# EAGLE board artlight (EAGLE 9.2.2)
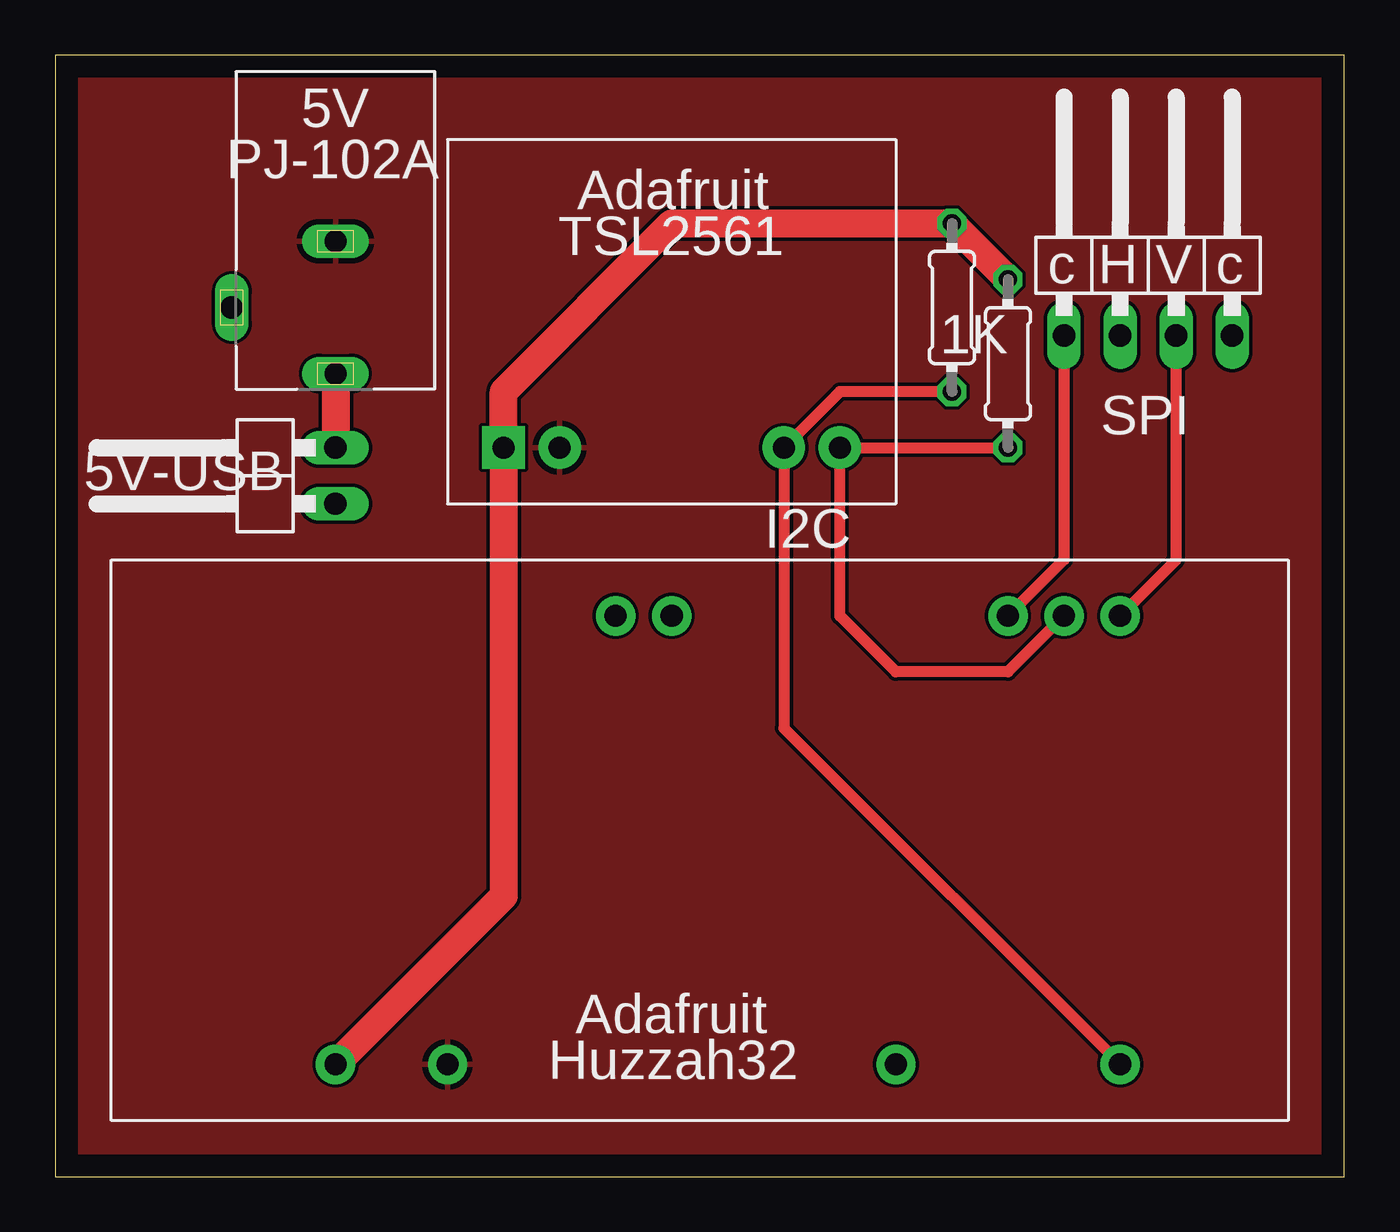
[diagram p0: board, top side]
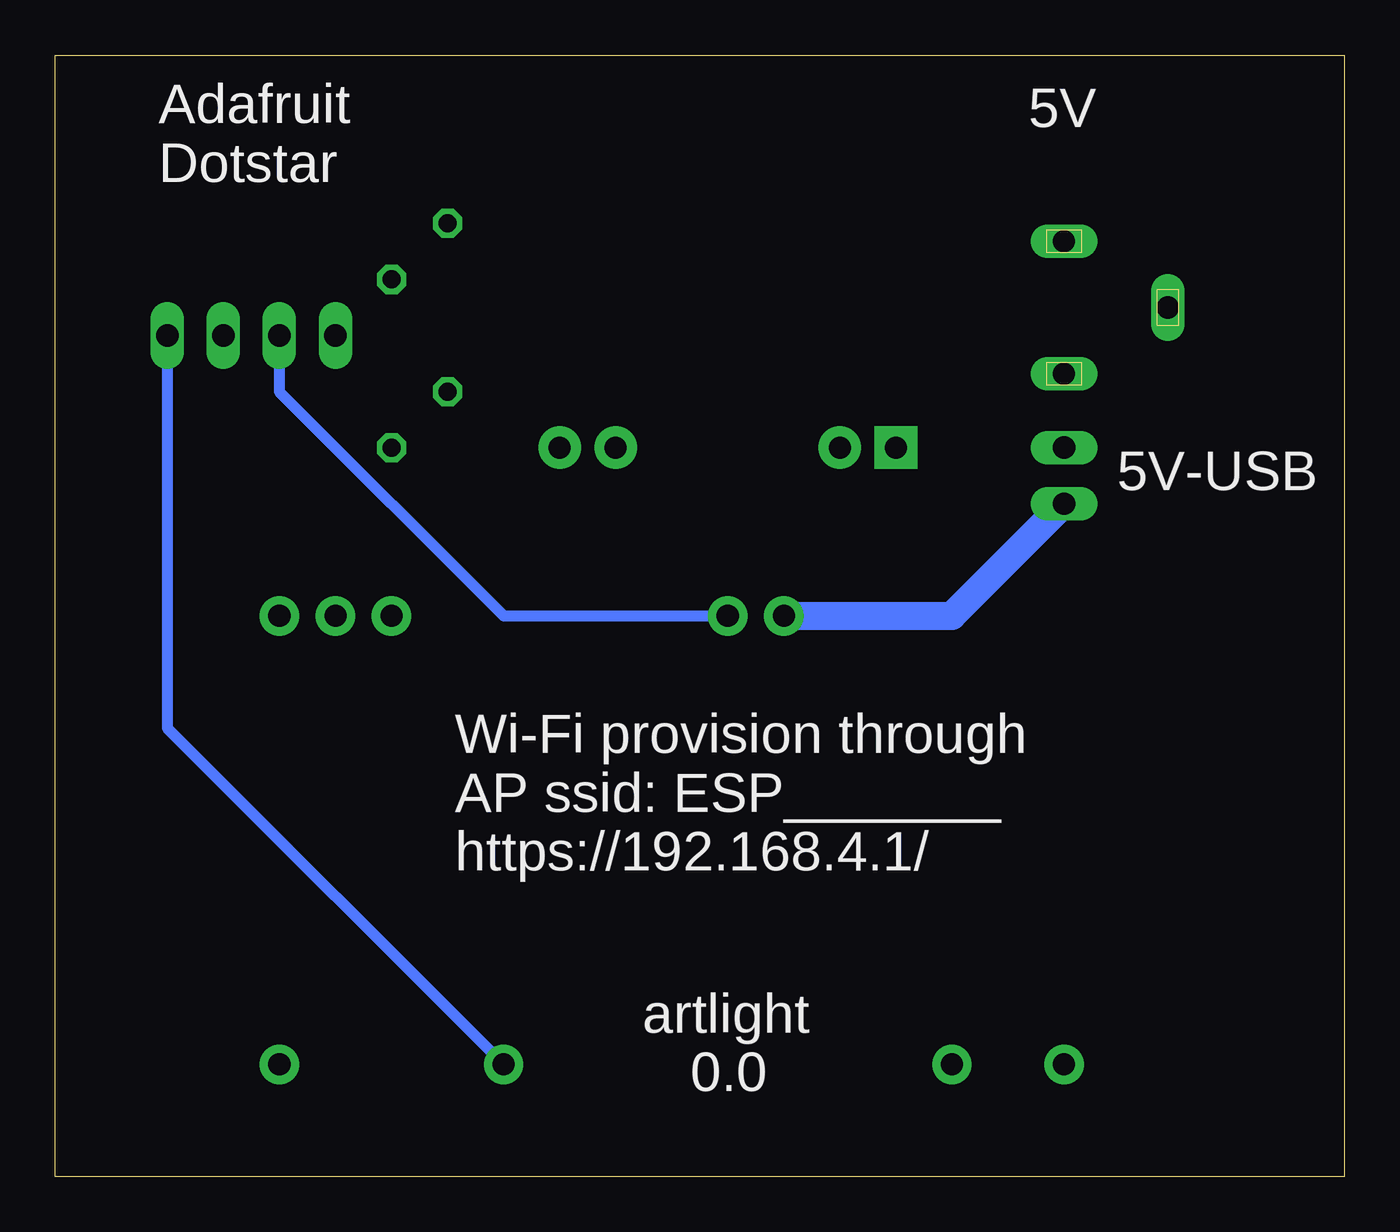
[diagram p1: board, bottom side, seen from below]

Size 58.42 x 50.8 mm. Coordinates in mm from the lower left corner, seen from the top.
Outline: 0,0 58.42,0 58.42,50.8 0,50.8 0,0
Copper layers (1*16): Top 0.035mm / dielectric 1.5mm / Bottom 0.035mm
Design rules "default": minimum track width 6mil, minimum drill 0.35mm, track to track 6mil, track to pad 6mil, pad to pad 6mil, via to via 6mil, smd to smd 6mil, copper to edge 40mil, drill to drill 6mil, minimum pad ring 10mil, minimum via ring 8mil, stop-mask expansion 4mil, vias tented up to drill 0mil, thermal gap 10mil
Net classes: 0 default: width 0.508 mm; 2 power: width 1.27 mm

## Footprints (pad centres in the part's own frame; a part is rotated, then mirrored left to right if it is on the bottom)
CUI_PJ-102A = drill 1 long: 1 0,-3; 2 0,3; 3 -4.7,0
1X02/90 = drill 1.016 long: 1 -1.27,-3.81; 2 1.27,-3.81
1X04/90 = drill 1.016 long: 1 -3.81,-3.81; 2 -1.27,-3.81; 3 1.27,-3.81; 4 3.81,-3.81
0204/7 = drill 0.813 octagon: 1 -3.81,0; 2 3.81,0
FEATHERWING-ARTLIGHT = drill 1 pad 1.778: 3.3V -17.78,-10.16; 5VUSB -5.08,10.16; GND -12.7,-10.16; HSPI:MOSI -2.54,10.16; HSPI:SCLK 12.7,10.16; I2C:SCL 15.24,10.16; I2C:SDA 17.78,-10.16; VSPI:MOSI 17.78,10.16; VSPI:SCLK 7.62,-10.16
TSL2561-ARTLIGHT = drill 1 pad 1.93: GND -5.08,-5.08; SCL 7.62,-5.08; SDA 5.08,-5.08 | drill 1 pad 1.93 square: VIN -7.62,-5.08

## Placement (x,y rotation side)
J1  PJ-102A  [CUI_PJ-102A]  12.7,39.37 0 top
JP1  5VUSB  [1X02/90]  8.89,31.75 90 top
JP2  SPI  [1X04/90]  49.53,41.91 0 top
R1  1K  [0204/7]  43.18,36.83 90 top
R2  1K  [0204/7]  40.64,39.37 90 top
U$1  HUZZAH32-ARTLIGHT  [FEATHERWING-ARTLIGHT]  30.48,15.24 0 top
U$3  TSL2561-ARTLIGHT  [TSL2561-ARTLIGHT]  27.94,38.1 0 top

## Library data of the parts
J1 = PJ-102A; AVAILABILITY: Good; DESCRIPTION: 2.0 mm Center Pin%2C 2.5 A%2C Right Angle%2C Through Hole%2C Tapered Pins%2C Dc Power Jack Connector; MANUFACTURER: CUI inc; MF: CUI; MP: PJ-102A; PACKAGE: None; PRICE: 0.44 USD
JP1 JP2 = pinhead
R1 R2 = rcl; SPICEPREFIX: R
U$1 U$3 = artlight

## Nets
3: J1.3
5VUSB [power]: JP1.1 U$1.5VUSB
+3V3 [power]: R1.2 R2.2 U$1.3.3V U$3.VIN
+5V [power]: J1.1 JP1.2
GND [ground]: J1.2 U$1.GND U$3.GND
HSPI-MOSI: JP2.2 U$1.HSPI:MOSI
I2C-SCL: R1.1 U$1.I2C:SCL U$3.SCL
I2C-SDA: R2.1 U$1.I2C:SDA U$3.SDA
N$1: JP2.3 U$1.VSPI:MOSI
N$2: JP2.1 U$1.HSPI:SCLK
VSPI-SCLK: JP2.4 U$1.VSPI:SCLK

## Tracks (layer width: path | path; a pad name or v marks a point on that pad's centre or on a via)
5VUSB
  Bottom 1.27: U$1.5VUSB 17.78,25.4 JP1.1
+3V3
  Top 1.27: U$1.3.3V 20.32,12.7 U$3.VIN 20.32,35.56 27.94,43.18 R2.2 R1.2
+5V
  Top 1.27: J1.1 JP1.2
GND
  pour Top: 0,50.8 58.42,50.8 58.42,0 0,0
HSPI-MOSI
  Bottom 0.508: JP2.2 48.26,35.56 38.1,25.4 U$1.HSPI:MOSI
I2C-SCL
  Top 0.508: U$1.I2C:SCL 43.18,22.86 38.1,22.86 35.56,25.4 U$3.SCL R1.1
I2C-SDA
  Top 0.508: U$1.I2C:SDA 33.02,20.32 U$3.SDA 35.56,35.56 R2.1
N$1
  Top 0.508: U$1.VSPI:MOSI 50.8,27.94 JP2.3
N$2
  Top 0.508: JP2.1 45.72,27.94 U$1.HSPI:SCLK
VSPI-SCLK
  Bottom 0.508: JP2.4 53.34,20.32 U$1.VSPI:SCLK

## Text on the board
tPlace: 5V | PJ-102A | Adafruit | TSL2561 | c | H | V | c | 1K | SPI | 5V-USB | I2C | Adafruit | Huzzah32
bPlace: 5V | Adafruit / Dotstar | 5V-USB | Wi-Fi provision through / AP ssid: ESP_______ / https://192.168.4.1/ | artlight | 0.0